# Altium PCB EE_smallOB_BW_v1.0.PcbDoc (part 3 of 4)
Units mil, origin at the board's own origin, x right, y up, seen from the top; angles counter-clockwise.
Board outline 1388 x 1586.96 mil, 4 copper layers (Top Layer, Layer 1, Layer 2, Bottom Layer), stack 37.371 mil thick; 116 components, 102 nets, 640 pads, 211 vias.
Unrouted connection lines stored in the file: 1.
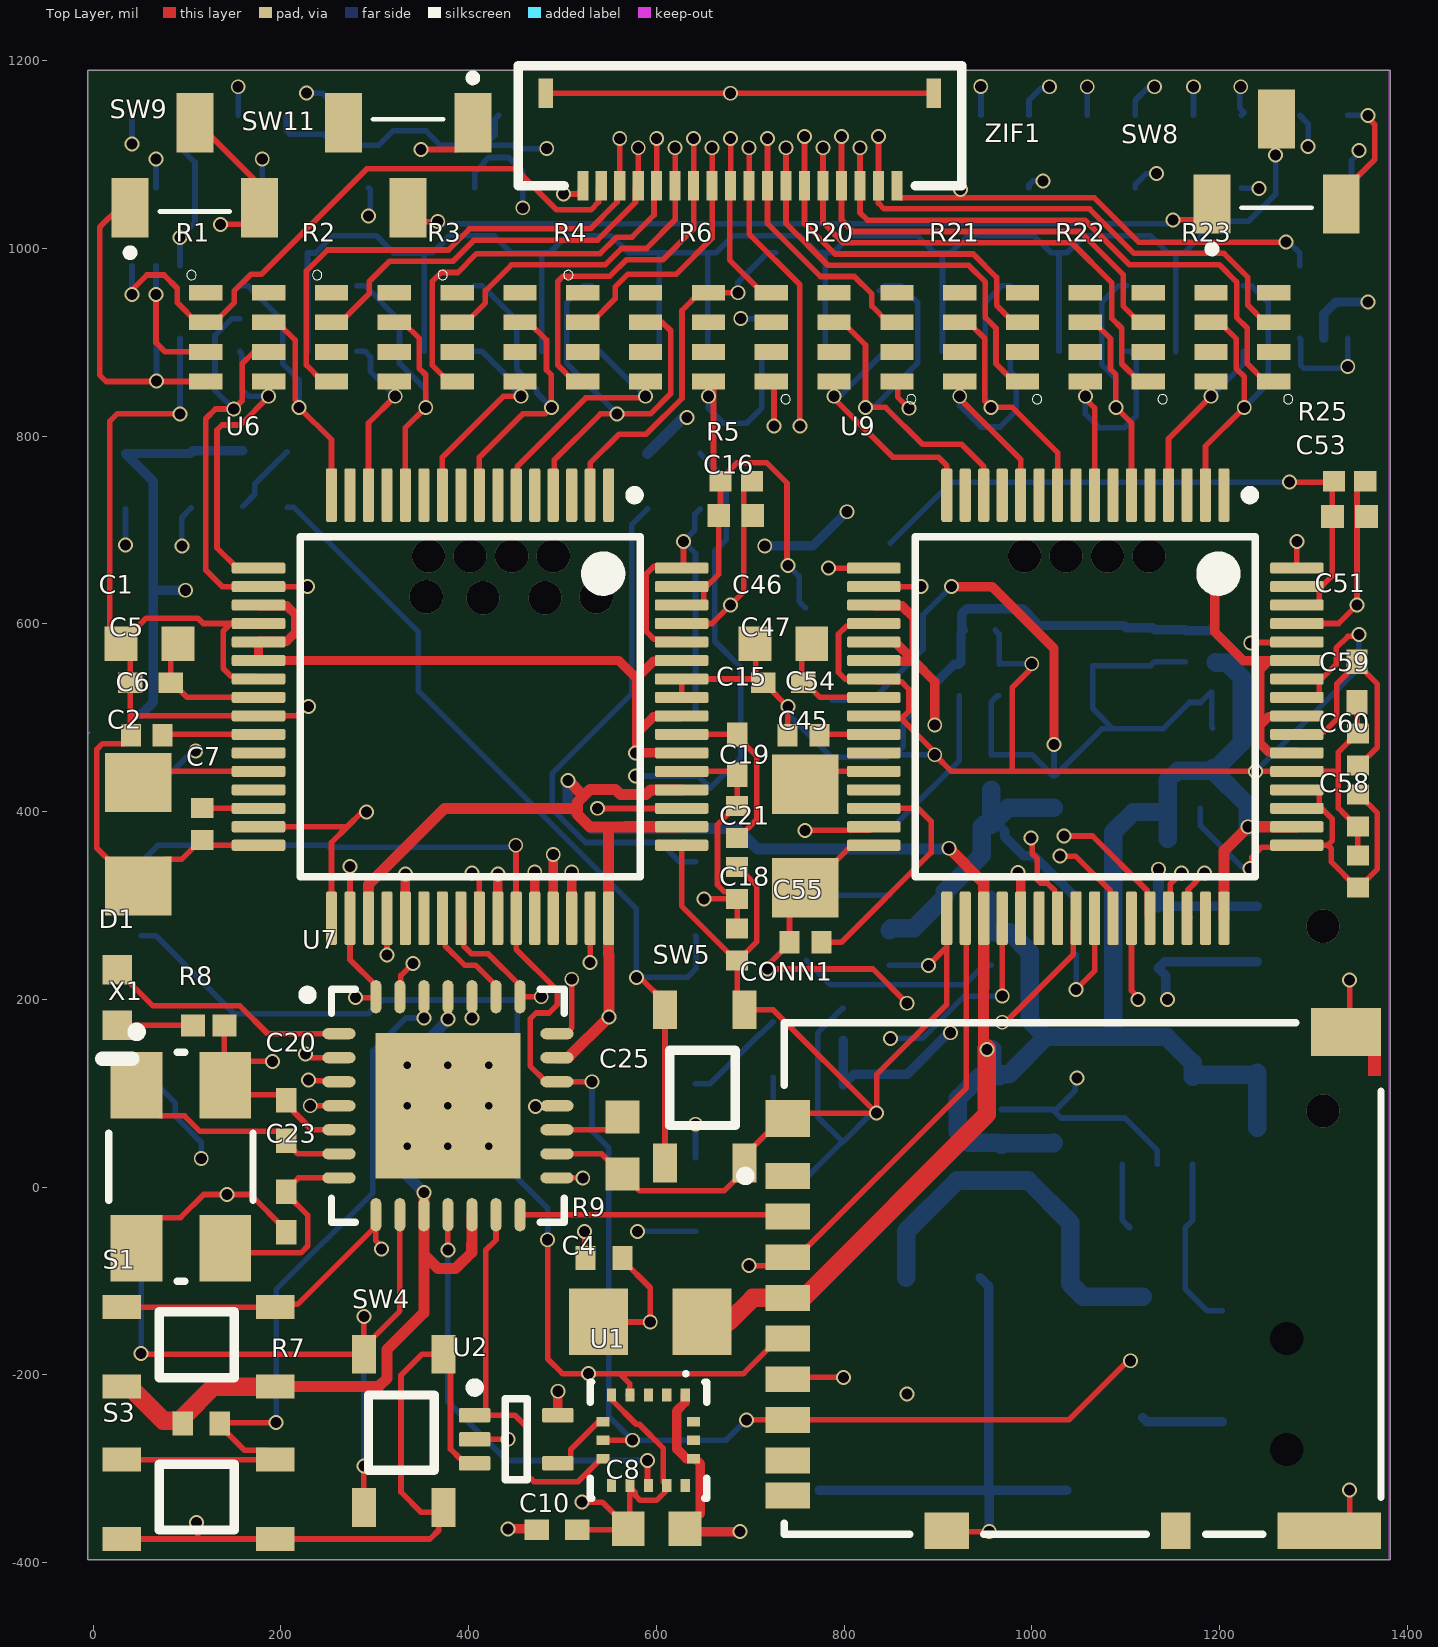
[diagram p0: Top Layer view]

## Via types
v1: diameter 15.87, hole 11.81, Top Layer to Bottom Layer, 188 vias
v2: diameter 35.43, hole 35.43, Top Layer to Bottom Layer, 14 vias
v3: diameter 19.68, hole 7.87, Top Layer to Bottom Layer, 9 vias

## Nets (pads, with @x,y where several pads share a name; then routed paths per layer and width w, separated by ;. In a path a pad name is that pad's centre, name@x,y a point inside that pad or via, vN(x,y) a via of type N, cw(c..) or ccw(c..) an arc to the next point about the centre after c; other vN are vias at no path point) (continued)
9P: (continued)
  Layer 1 w6: v1(698.82,1107.28) 698.82,1140.75 730.5,1172.43 v1(945.68,1172.43) ; v1(752.95,811.02) 850.39,811.02 v1(869.09,829.72)
  Bottom Layer w6: v1(945.68,1172.43) 945.87,1172.24 D15.1@945.87,1141.85
10P: D15.4 R20.3 ZIF1.11 | length 642.9
  Top Layer w6: v1(718.5,1117.13) ZIF1.11@718.5,1066.93 718.5,1026.57 774.96,970.12 810.81,970.12 829.58,951.35 829.58,938.63 846.95,921.26 R20.3@856.3,921.26
  Layer 1 w6: v1(718.5,1117.13) 718.5,1089.57 744.47,1063.6 896.67,1063.6 915.75,1082.68 1000.98,1082.68 v1(1011.81,1071.85)
  Bottom Layer w6: D15.4@997.05,1064.85 997.05,1067.85 1001.05,1071.85 v1(1011.81,1071.85)
11P: D16.1 R21.1 ZIF1.12 | length 848.8
  Top Layer w6: v1(738.19,1107.28) ZIF1.12@738.19,1066.93 738.19,1026.57 782.64,982.12 932.67,982.12 950.54,964.25 950.54,926.39 961.94,914.99 961.94,877.13 980.81,858.27 R21.1@990.16,858.27
  Layer 1 w6: v1(738.19,1107.28) 738.19,1140.75 757.87,1160.43 866.04,1160.43 871.16,1155.31 1042.12,1155.31 v1(1059.06,1172.24)
  Bottom Layer w6: D16.1@1059.06,1141.85 v1(1059.06,1172.24)
12P: D16.4 R21.3 ZIF1.13 | length 838.4
  Top Layer w6: ZIF1.13@757.87,1066.93 757.87,1026.57 790.33,994.12 937.64,994.12 962.54,969.22 962.54,939.53 980.81,921.26 R21.3@990.16,921.26 ; ZIF1.13@757.87,1066.93 v1(757.91,1119.15)
  Layer 1 w6: v1(757.91,1119.15) 757.91,1090.51 770.08,1078.35 894.45,1078.35 911.26,1095.15 1101.7,1095.15 1117.13,1079.72 v1(1132.87,1079.72)
  Bottom Layer w6: D16.4@1110.24,1064.85 1110.24,1067.85 1122.11,1079.72 v1(1132.87,1079.72)
13P: D17.1 R22.1 ZIF1.14 | length 1012.8
  Top Layer w6: v1(777.56,1107.28) ZIF1.14@777.56,1066.93 777.56,1027.56 799,1006.12 1042.53,1006.12 1085.3,963.35 1085.3,925.49 1095.8,914.99 1095.8,877.13 1114.67,858.27 R22.1@1124.02,858.27
  Layer 1 w6: v1(777.56,1107.28) 777.56,1134.84 790.8,1148.09 861.41,1148.09 866.19,1143.31 1143.31,1143.31 v1(1172.24,1172.24)
  Bottom Layer w6: D17.1@1172.24,1141.85 v1(1172.24,1172.24)
14P: D17.4 R22.3 ZIF1.15 | length 991.2
  Top Layer w6: v1@797.24,1117.13 ZIF1.15@797.24,1066.93 797.24,1030.51 809.63,1018.12 1051.34,1018.12 1097.3,972.17 1097.3,938.63 1114.67,921.26 R22.3@1124.02,921.26
  Layer 1 w6: v1(797.28,1119.15) 797.24,1119.11 797.24,1098.43 805.32,1090.35 831.81,1090.35 848.61,1107.15 1150.72,1107.15 1193.9,1063.98 v1(1242.13,1063.98)
  Bottom Layer w6: D17.4@1223.43,1064.85 1224.3,1063.98 v1(1242.13,1063.98)
15P: D18.1 R23.1 ZIF1.16 | length 1182.4
  Top Layer w6: v1(816.93,1107.28) ZIF1.16@816.93,1066.93 816.93,1038 824.8,1030.12 1056.49,1030.12 1103.87,982.75 1199.76,982.75 1218.26,964.25 1218.26,926.39 1229.66,914.99 1229.66,877.13 1248.52,858.27 R23.1@1257.87,858.27
  Layer 1 w6: v1(816.93,1107.28) 817.77,1108.13 817.77,1124.22 829.64,1136.09 856.44,1136.09 861.22,1131.31 1160.51,1131.31 1183.1,1108.71 1245.19,1108.71 1252.83,1116.35 1266.86,1116.35 1274.49,1108.71 v1(1294.45,1108.71)
  Bottom Layer w6: D18.1@1285.43,1141.85 1294.45,1132.83 v1(1294.45,1108.71)
16P: D18.4 R23.3 ZIF1.17 | length 1142.6
  Top Layer w6: ZIF1.17@836.61,1066.93 836.61,1048.23 842.72,1042.12 1061.46,1042.12 1108.84,994.75 1204.73,994.75 1230.26,969.22 1230.26,939.53 1248.52,921.26 R23.3@1257.87,921.26 ; ZIF1.17@836.61,1066.93 v1(836.63,1119.13)
  Layer 1 w6: v1@836.66,1119.15 1155.7,1119.15 1183.31,1091.54 1189.21,1085.63 1249.67,1085.63 1252.83,1082.47 1266.86,1082.47 1270.02,1085.63 1325.9,1085.63 1344.6,1104.33 v1(1348.43,1104.33)
  Bottom Layer w6: D18.4@1336.61,1064.85 1340.61,1068.85 1340.61,1093.85 1348.43,1101.66 v1(1348.43,1104.33)
+3V3: D8.2 D13.1 R12.2 R16.2 R18.2 SW2.1 WIFI1.8 | length 2044.7
  Layer 2 w10: v1(98.43,635.83) 248.03,785.43 598.43,785.43 v1(632.87,819.88)
  Layer 2 w11.81: v1(632.87,819.88) 633.65,819.1 658.26,819.1 946.85,530.51 1066.93,530.51 1134.9,462.54 v1(1134.9,338.6)
  Bottom Layer w10: WIFI1.8@51.18,503.94 64.15,516.91 64.15,634.35 ; v1(98.43,635.83) 65.63,635.83 64.15,634.35 ; D13.1@159.45,784.45 106.3,784.45 R16.2@104.33,782.48 103.35,781.5 R12.2@34.45,781.5 64.15,751.79 64.15,634.35 ; D8.2@1135.81,299.21 SW2.1@1240.16,299.21
  Bottom Layer w11.81: R18.2@590.55,781.5 628.16,819.1 632.1,819.1 v1(632.87,819.88) ; D8.2@1134.84,298.25 1135.81,299.21 1134.87,300.15 v1(1134.9,338.6)
-RAW: C33.2 C36.1 U3.2 VR1.2 VR1.3 | length 413.6
  Bottom Layer w10: VR1.3@956.69,385.83 964.57,385.83 971.38,379.01 971.38,372.9 991.17,353.11 1002.01,353.11 1046.46,308.66 C33.2@1047.24,308.66
  Bottom Layer w19.68: U3.2@848.43,273.62 850.39,275.59 874.02,275.59 907.48,309.06 907.48,314.54 946.85,353.9 946.85,383.86 948.82,385.83 VR1.3@956.69,385.83 ; VR1.2@956.69,423.23 VR1.3@956.69,385.83 ; C36.1@1023.62,404.25 975.12,404.25 VR1.3@956.69,385.83
_SRB1: C3.5 R1.5 SW8.1 SW11.2 U6.17 U9.17 | length 2178.3
  Top Layer w6: U6.17@178,659.45 U6.17@176.18,659.45 153.54,659.45 132,680.99 132,806.59 137.37,811.96 156.78,811.96 187.01,842.19 v1(187.01,842.52) R1.5@187.01,858.27 ; SW11.2@335.63,1043.31 350.39,1028.54 v1(367.13,1028.54) ; v1(783.46,659.45) U9.17@831.69,659.45 ; v1(1150.59,1030.51) 1175.24,1030.51 SW8.1@1191.93,1047.24
  Layer 1 w6: v1(187.01,842.52) 367.13,1022.64 v1(367.13,1028.54) ; v1(783.46,659.45) 886.03,762.02 886.03,996.27 919.29,1029.53 1149.61,1029.53 v1(1150.59,1030.51)
  Bottom Layer w6: C3.5@156.35,890.2 158.46,888.08 158.46,849.41 165.35,842.52 v1(187.01,842.52) ; v1(367.13,1028.54) 369.3,1026.37 1143.78,1026.37 1147.92,1030.51 v1(1150.59,1030.51)
_SRB2: C3.6 R1.6 SW11.1 U6.18 U9.18 | length 1851.1
  Top Layer w6: R1.6@187.01,889.76 171.26,889.76 158.8,877.3 158.8,837.93 v1(149.77,828.9) 130.4,828.9 120,818.5 120,657.26 137.5,639.76 U6.18@176.18,639.76 v1(228.35,639.76) ; v1(349.41,1105.32) 349.46,1105.36 387.84,1105.36 404.53,1122.05 SW11.1@404.53,1133.86 ; U9.18@831.69,639.76 v1(881.89,639.76)
  Layer 1 w6: v1(149.77,828.9) 118.11,860.56 118.11,1057.42 173.1,1112.41 267.75,1112.41 274.84,1105.32 v1(349.41,1105.32) ; v1(228.35,639.76) 267.72,639.76 337.6,709.65 520.67,709.65 590.55,639.76 v1(881.89,639.76)
  Bottom Layer w6: v1(149.77,828.9) 129.85,848.82 129.85,907.2 147.85,925.2 C3.6@156.35,925.2
acl3V3: C8.1 C10.1 D8.1 SW2.2 U1.1 U1.14 U2.5 | length 1826.6
  Top Layer w10: v1(441.93,-364.17) 471.61,-364.17 C10.1@472.6,-365.16 ; U2.5@495.08,-243.11 v1(495.08,-217.52) ; U1.1@630.91,-221.46 630.83,-221.54 630.83,-229.22 621.87,-238.17 621.87,-279.16 632,-289.29 639.69,-289.29 U1.14@639.76,-289.37 641.58,-289.37 646.83,-294.62 646.83,-348.06 C8.1@630.71,-364.17 633.66,-367.13 v1(688.98,-367.13)
  Layer 1 w10: v1(495.08,-217.52) 495.08,-265.75 441.93,-318.9 v1(441.93,-364.17) 442.91,-364.17 444.88,-366.14 687.99,-366.14 v1(688.98,-367.13) 892.53,-367.13 942.72,-316.93 1120.08,-316.93 1144.68,-292.32 v1(1144.68,199.8)
  Bottom Layer w10: v1(1144.68,199.8) 1144.68,201.39 1142.83,203.25 1142.83,225.26 D8.1@1134.84,233.25 1141.59,240 SW2.2@1240.16,240